# Altium PCB mach-relay.PcbDoc
Units mm, origin at the board's own origin, x right, y up, seen from the top; angles counter-clockwise.
Board outline 46.48 x 26.67 mm, 2 copper layers (Top Layer, Bottom Layer); 6 components, 5 nets, 20 pads, 2 vias.
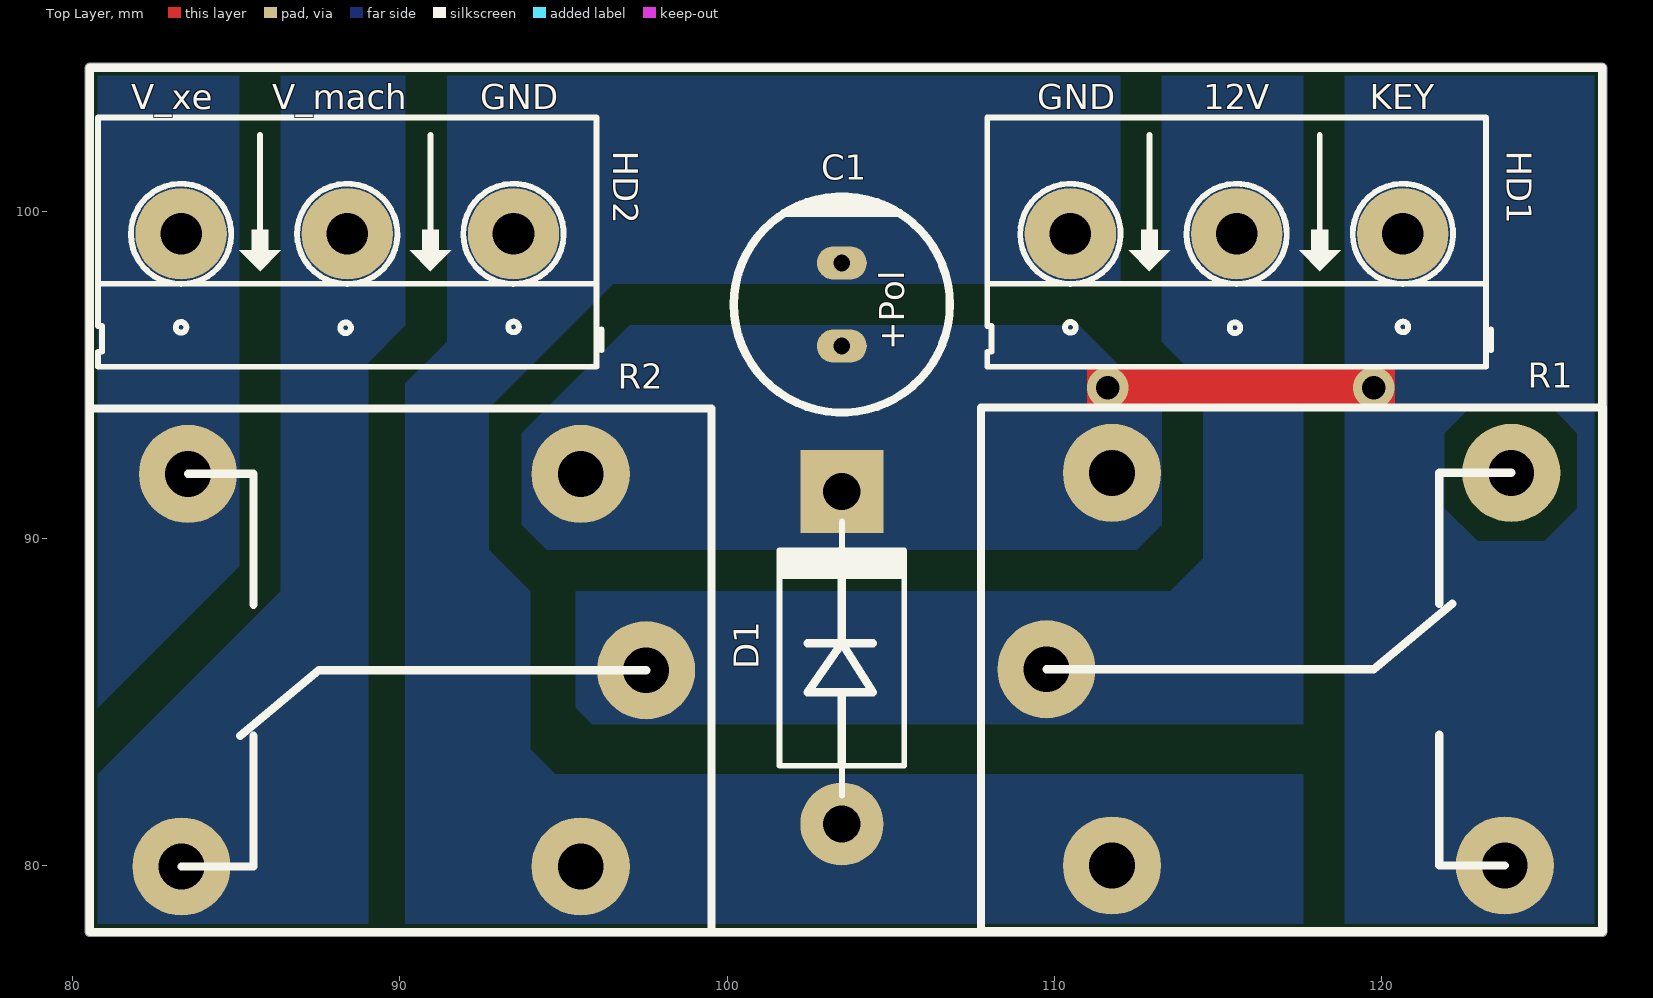
[diagram p0: Top Layer view]
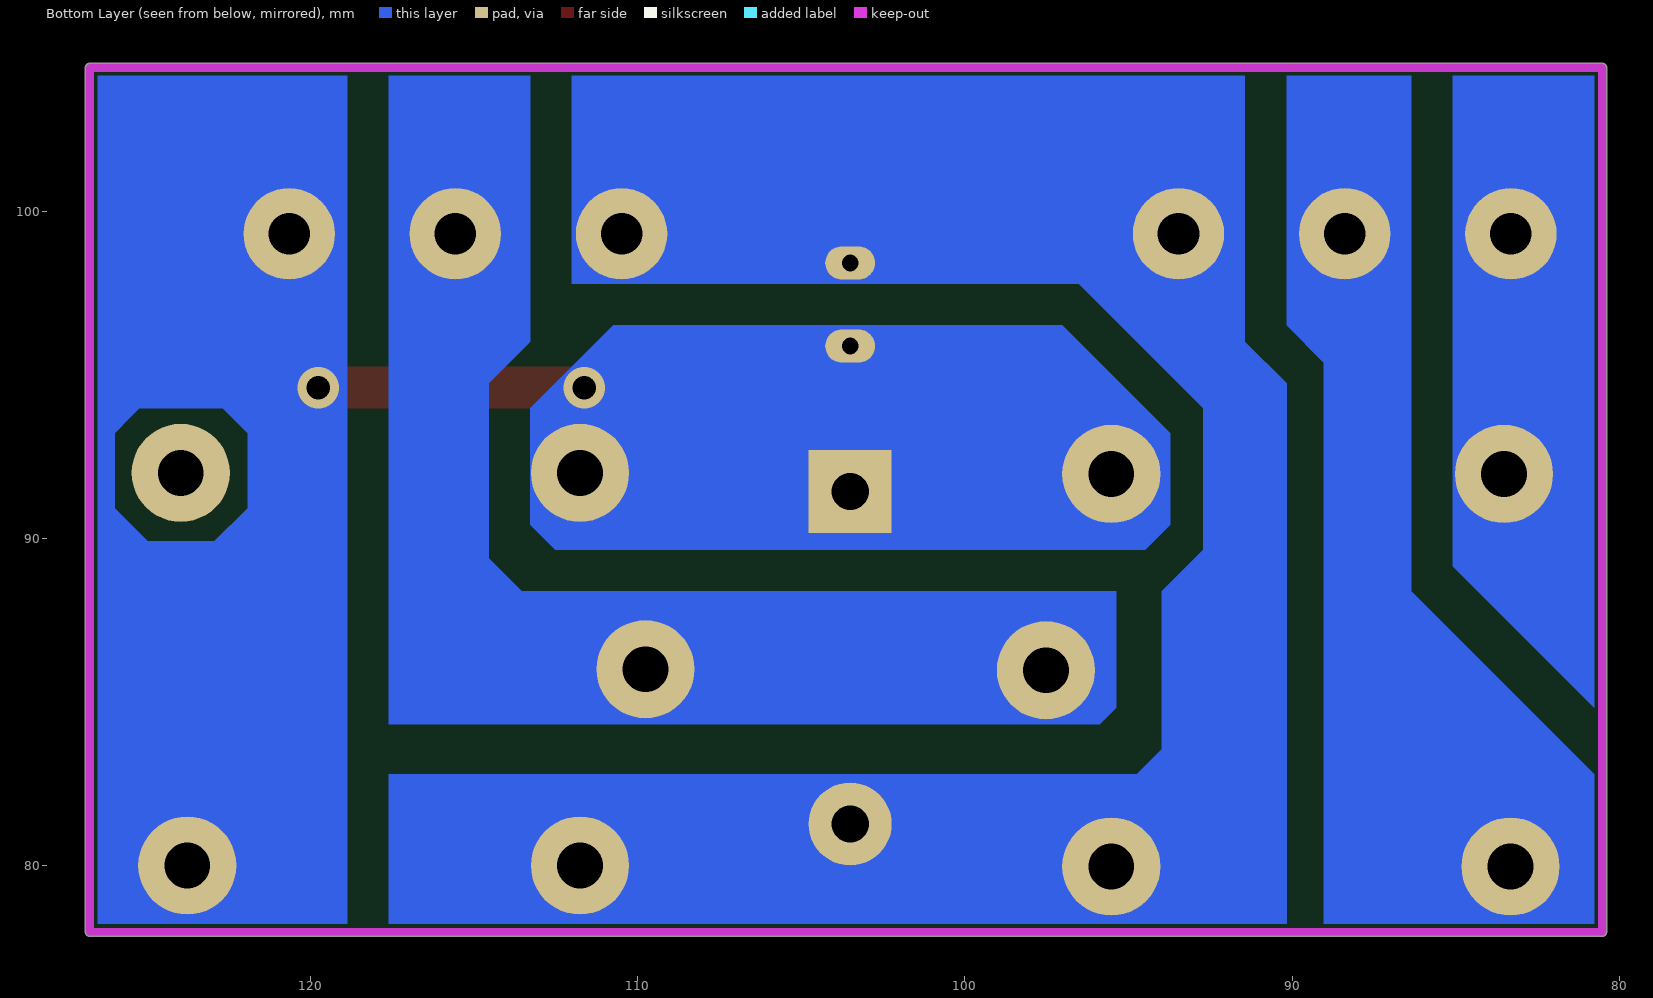
[diagram p1: Bottom Layer view, seen from below]

## Layer stack, top to bottom
Top Solder: solder mask 0.0102, Solder Resist, Dk 3.5
Top Layer: signal copper 0.0356
Dielectric 1: dielectric 0.32, FR-4, Dk 4.8
Bottom Layer: signal copper 0.0356
Bottom Solder: solder mask 0.0102, Solder Resist, Dk 3.5

## Board outline
80.391,77.978 ccw(c80.518,77.978) 80.518,77.851 126.746,77.851 ccw(c126.746,77.978) 126.873,77.978 126.873,104.394 ccw(c126.746,104.394) 126.746,104.521 80.518,104.521 ccw(c80.518,104.394) 80.391,104.394

## Design rules (kind name [scope] priority, off if disabled: settings)
Clearance [All] p1: gap=0.254 ignorepadtopadclearanceinfootprint=FALSE except(0: Arc-Hole Track-Hole SMDPad-Hole THPad-Hole Via-Hole Fill-Hole Poly-Hole Region-Hole Text-Hole)
PolygonConnect [All] p1: connectstyle=Relief reliefconductorwidth=0.254 reliefentries=4 polygonreliefangle="90 Angle" airgapwidth=0.254
RoutingVias [All] p1: holewidth=0.711 width=1.27 viastyle="Through Hole" minholewidth=0.711 minwidth=1.27 maxholewidth=0.711 maxwidth=1.27
SolderMaskExpansion [All] p1: expansion=0.102
Width [All] p1: maxlimit=0.254 minlimit=0.254 preferedwidth=0.254
30 further rules are at their usual default settings.

## Components (designator, comment, footprint, x,y, rotation, side; value= is the part's Value field where it differs from the comment)
C1 "Pol-Cap" POL_250mil 103.505,97.155 r90 top
D1 "Diode" "DIODE - Horizontal" 103.505,86.36 r90 top
HD1 "HD_3" HEADER_3 113.03,112.014 r180 top
HD2 "HD_3" HEADER_3 85.852,112.014 r180 top
R1 "Relay_5pin" RELAY-5PIN 116.86,86.01 r180 top
R2 "Relay_5pin" RELAY-5PIN 90.424,85.979 r0 top

## Footprints (in the part's own frame and the unit in brackets; to place one, negate y for a bottom-side part, rotate by r counter-clockwise, add the part's x,y. Pads: shape width x height; smd on the part's side, far side on the other; paste and mask are expansions set on the pad)
"DIODE - Horizontal" [mil]
  round 100 hole 45: A(-200,0)
  rect 100x100 hole 45: C(200,0)
  silkscreen extent -166,-75 164,75, body extent -215,-51 215,51, height 100
HEADER_3 [mil]
  round 110 hole 50: 1(-300,500) 2(-100,500) 3(100,500)
  silkscreen extent -406,360 200,660, body extent -395,360 195,655, height 394
POL_250mil [mil]
  oval 40x60 hole 20: +(-50,0) -(50,0)
  silkscreen extent -130,-130 130,130
RELAY-5PIN [mm]
  round 3 hole 1.4: 1(7.1,0) 2(5.1,6) 3(-6.9,6) 4(-7.1,-6) 5(5.1,-6)
  silkscreen extent -9.9,-8 9.1,8

## Part data
C1: "T? di?n phân c?c"

## Via types
v1: diameter 1.27, hole 0.711, Top Layer to Bottom Layer, 2 vias

## Nets (pads, with @x,y where several pads share a name; then routed paths per layer and width w, separated by ;. In a path a pad name is that pad's centre, name@x,y a point inside that pad or via, vN(x,y) a via of type N, cw(c..) or ccw(c..) an arc to the next point about the centre after c; other vN are vias at no path point)
+12: HD1.2 R1.1 R2.1 | length 29.9
  Bottom Layer w0.254: R2.1@97.385,86.01 R1.1 113.315,86.01 115.57,88.265 HD1.2@115.57,99.06
GND: C1.- D1.A HD1.3 HD2.1 R1.2 R2.5 | length 67.1
  Bottom Layer w0.254: C1.- 104.14,99.06 110.49,99.06 107.315,102.235 96.655,102.235 93.48,99.06 92.456,98.036 92.456,80.899 93.345,80.01 95.385,80.01 102.235,80.01 D1.A 104.775,80.01 R1.2 R1.2@111.125,79.375
NetC1_+: C1.+ D1.C HD1.1 R1.3 R1.5 R2.2 | length 49.8
  Top Layer w0.254: v1(111.633,94.615) v1(119.761,94.615)
  Bottom Layer w0.254: R2.2@95.385,92.01 102.935,92.01 D1.C ; C1.+ D1.C ; R1.5 104.075,92.01 D1.C ; HD1.1@120.65,99.06 120.65,83.12 R1.3
NetHD2_2: HD2.2 R2.4 | length 21.2
  Bottom Layer w0.254: R2.4@83.185,80.01 88.4,85.225 HD2.2@88.4,99.06
NetHD2_3: HD2.3 R2.3 | length 7.1
  Bottom Layer w0.254: HD2.3@83.32,99.06 83.32,92.075 R2.3@83.385,92.01
pads on no net: R1.4

## Keep-outs
Keep-Out Layer:
  lines w0.254: 80.518,77.978 80.518,102.616 80.518,104.394 126.746,104.394 126.746,77.978 80.518,77.978

## Other copper
Top Layer:
  region net NetC1_+: 110.998,95.25 110.998,93.98 120.396,93.98 120.396,95.25
  region: 95.758,95.25
Bottom Layer:
  region net +12: 117.602,84.328 117.602,104.14 113.284,104.14 113.284,96.012 114.554,94.742 114.554,89.408 113.538,88.392 95.377,88.392 95.377,84.836 95.885,84.328
  region net NetC1_+: 93.726,90.424 94.488,89.662 112.522,89.662 113.284,90.424 113.284,93.98 110.744,96.52 97.028,96.52 93.726,93.218
  region net NetC1_+: 118.872,78.232 126.492,78.232 126.492,85.344 125.476,86.36 126.238,86.36 125.984,89.916 122.936,89.916 121.92,90.932 121.92,93.218 122.682,93.98 125.222,93.98 126.238,92.964 126.492,93.218 126.492,104.14 118.872,104.14
  region net NetC1_+: 126.492,93.218 126.238,92.964 126.238,88.392 126.492,88.138
  region net NetC1_+: 124.968,89.916 125.984,90.932 126.238,90.932 126.238,89.662
  region net NetC1_+: 125.984,93.218 125.984,88.646 126.238,88.392 126.492,88.646 126.492,93.218
  region net NetC1_+: 123.19,88.646 126.492,88.646 126.492,78.74
  region net NetC1_+: 121.92,92.964
  region net NetC1_+: 122.682,89.916
  region net NetC1_+: 121.92,89.662
  region net GND: 90.17,78.232 117.602,78.232 117.602,82.804 94.742,82.804 93.98,83.566 93.98,88.392 92.71,89.662 92.71,93.98 96.52,97.79 112.014,97.79 112.014,104.14 91.44,104.14 91.44,96.012 90.17,94.742
  region net NetHD2_2: 90.17,104.14 86.36,104.14 86.36,97.028 86.36,96.774 86.36,88.392 80.772,82.804 80.772,78.232 89.027,78.232 89.027,95.377 90.17,96.52
  region: 86.36,94.488
  region: 86.36,93.98
  region: 86.36,94.488
  region net NetHD2_3: 85.09,104.14 80.772,104.14 80.772,84.836 85.09,89.154

## Silkscreen, mask and mechanical layers (free items; w line width, h text height)
Top Overlay:
  lines w0.254: 80.518,77.978 80.518,104.394 126.746,104.394 126.746,77.978 80.518,77.978
  text "V_xe" at 81.788,103.124 h0.76
  text "V_mach" at 86.106,103.124 h0.76
  text "GND" at 92.456,103.124 h0.76
  text "GND" at 109.474,103.124 h0.76
  text "12V" at 114.554,103.124 h0.76
  text "KEY" at 119.634,103.124 h0.76

## Text inside footprints (layer, text, board x,y; h text height)
C1: Top Overlay "+Pol" at 105.41,95.758 h0.76 r90